# Altium PCB PCB1.PcbDoc
Units mil, origin at the board's own origin, x right, y up, seen from the top; angles counter-clockwise.
Board outline 1865 x 2080 mil, 2 copper layers (Top Layer, Bottom Layer); 15 components, 12 nets, 36 pads, 0 vias.
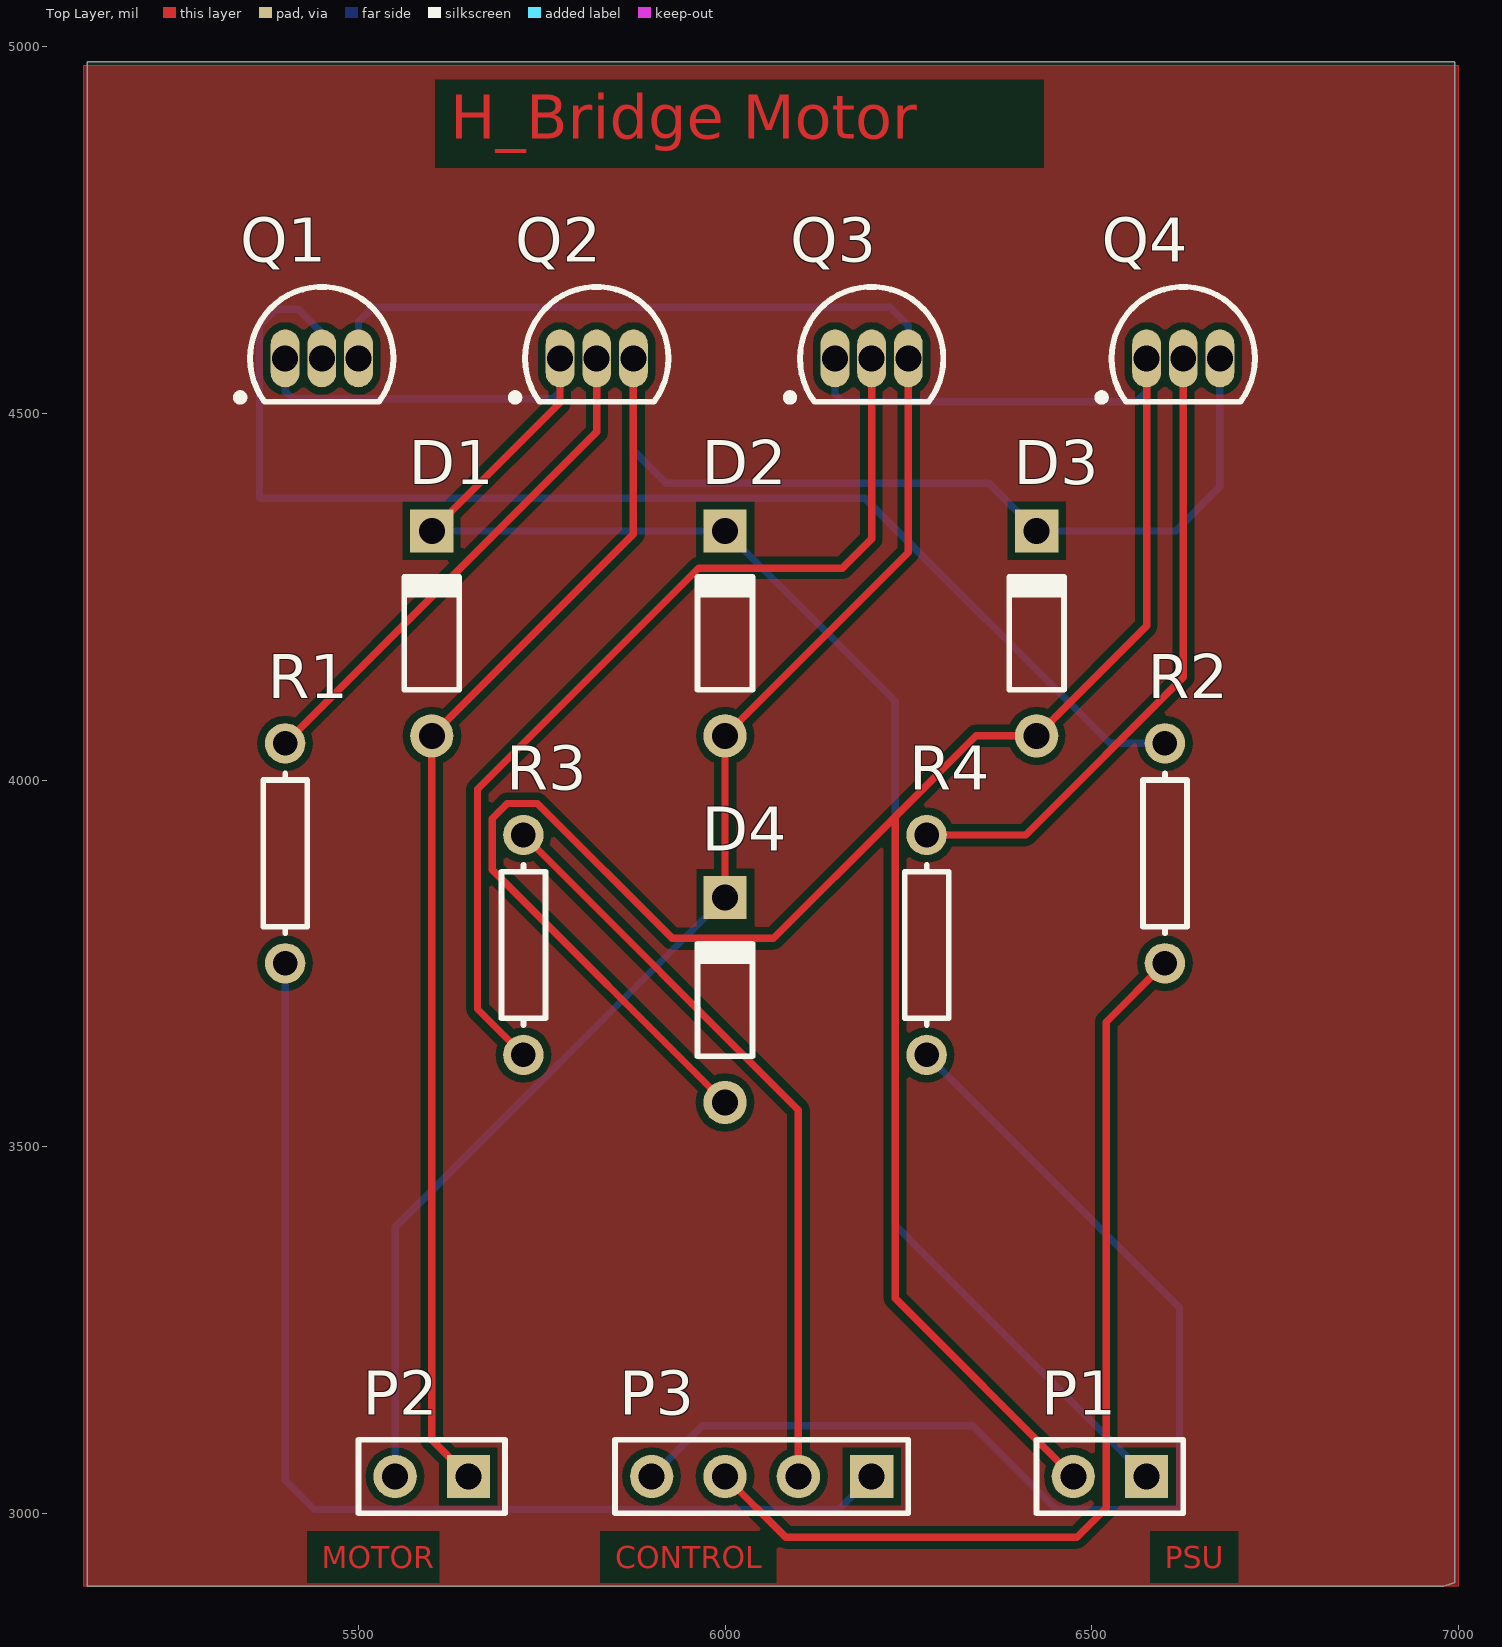
[diagram p0: Top Layer view]
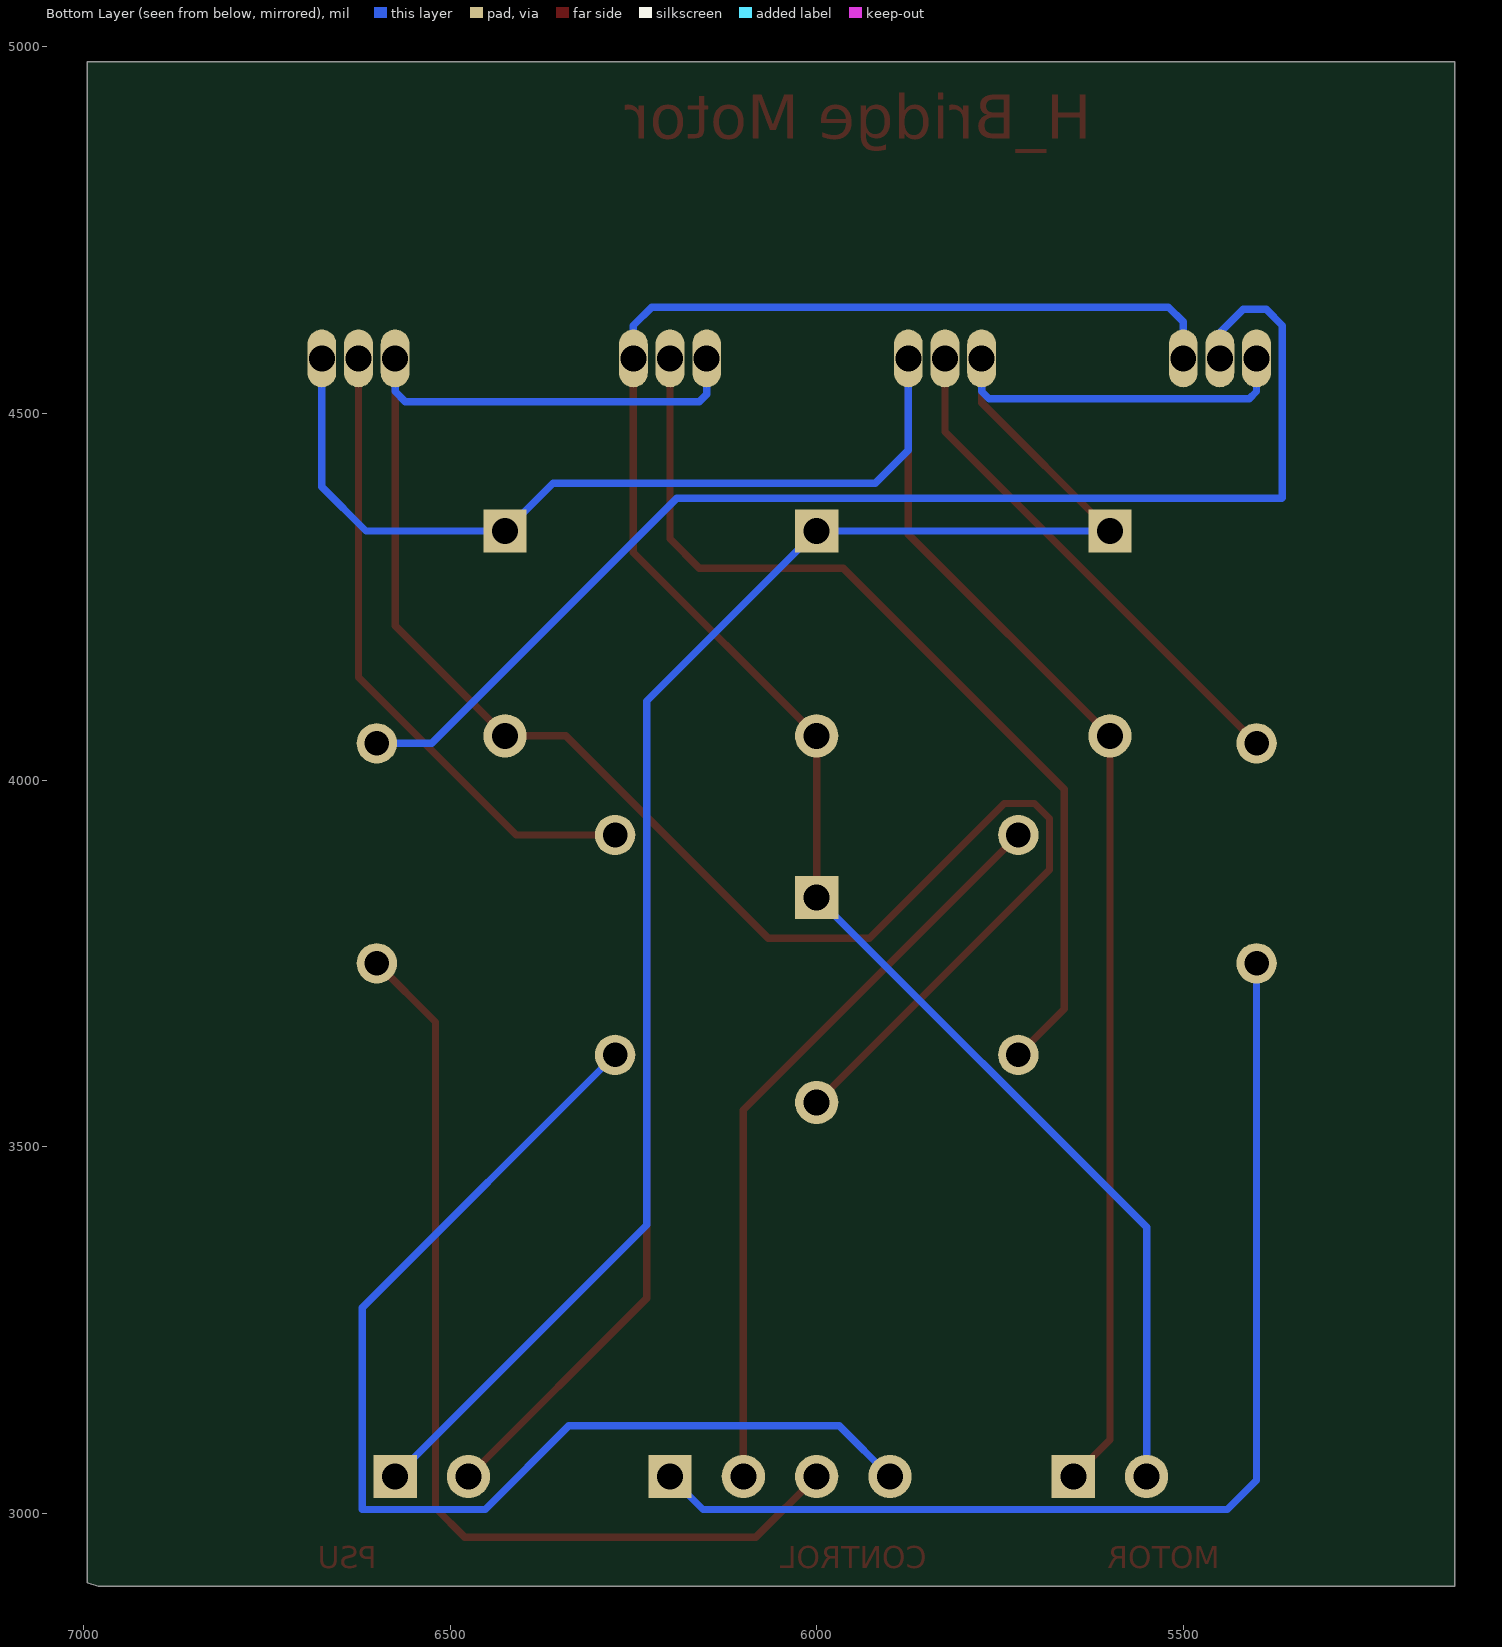
[diagram p1: Bottom Layer view, seen from below]

## Layer stack, top to bottom
Top Solder: solder mask 0.4, Solder Resist, Dk 3.5
Top Layer: signal copper 1.4
Dielectric 1: dielectric 12.6, FR-4, Dk 4.8
Bottom Layer: signal copper 1.4
Bottom Solder: solder mask 0.4, Solder Resist, Dk 3.5

## Board outline
5130,2900 6980,2900 6995,2905 6995,4980 5130,4980

## Design rules (kind name [scope] priority, off if disabled: settings)
Clearance [All] p1: gap=10 ignorepadtopadclearanceinfootprint=FALSE except(0: Arc-Hole Track-Hole SMDPad-Hole THPad-Hole Via-Hole Fill-Hole Poly-Hole Region-Hole Text-Hole)
PolygonConnect [All] p1: connectstyle=Relief reliefconductorwidth=10 reliefentries=4 polygonreliefangle="90 Angle" airgapwidth=10
RoomDefinition H_bridge_sch [InComponentClass('H_bridge_sch')] p1: confinementstyle=ConfineIn formatcopy=TRUE lockcomponents=FALSE outline 7015,3715 7100,3715 7100,4235 7015,4235
RoutingVias [All] p1: holewidth=28 width=50 viastyle="Through Hole" minholewidth=28 minwidth=50 maxholewidth=28 maxwidth=50
SolderMaskExpansion [All] p1: expansion=4
Width [All] p1: maxlimit=10 minlimit=10 preferedwidth=10
30 further rules are at their usual default settings.

## Components (designator, comment, footprint, x,y, rotation, side; value= is the part's Value field where it differs from the comment)
D1 "Diode 1N914" DO-35 5600,4200 r90 top
D2 "Diode 1N914" DO-35 6000,4200 r90 top
D3 "Diode 1N914" DO-35 6425,4200 r90 top
D4 "Diode 1N914" DO-35 6000,3700 r90 top
P1 "PSU" HDR1X2 6575,3050 r180 top
P2 "MOTOR" HDR1X2 5650,3050 r180 top
P3 "CONTROL" HDR1X4 6200,3050 r180 top
Q1 "2N3906" TO-92A 5450,4575 r270 top
Q2 "2N3906" TO-92A 5825,4575 r270 top
Q3 "2N3904" TO-92A 6200,4575 r270 top
Q4 "2N3904" TO-92A 6625,4575 r270 top
R1 "Res1" AXIAL-0.3 5400,3900 r90 top value=1K
R2 "Res1" AXIAL-0.3 6600,3900 r90 top value=1K
R3 "Res1" AXIAL-0.3 5725,3775 r90 top value=1K
R4 "Res1" AXIAL-0.3 6275,3775 r90 top value=1K

## Footprints (in the part's own frame and the unit in brackets; to place one, negate y for a bottom-side part, rotate by r counter-clockwise, add the part's x,y. Pads: shape width x height; smd on the part's side, far side on the other; paste and mask are expansions set on the pad)
AXIAL-0.3 [mm] "Axial Device, Thru-Hole; 2 Leads; 0.3 in Pin Spacing"
  round 1.4 hole 0.85: 1(-3.81,0) 2(3.81,0)
  silkscreen extent -2.77,-0.76 2.77,0.76
DO-35 [mm] "Diode, Axial; Body 3.8 x 1.9 mm (LxDia. max), Lead Dia. 0.53 mm (max)"
  round 1.5 hole 0.9: 1(-3.55,0)
  rect 1.5x1.5 hole 0.9: 2(3.55,0)
  silkscreen extent -1.95,-0.95 2.05,0.95
HDR1X2 [mm] "Connector; Header; 2 Position"
  rect 1.5x1.5 hole 0.9: 1(0,0)
  round 1.5 hole 0.9: 2(2.54,0)
  silkscreen extent -1.27,-1.27 3.81,1.27
HDR1X4 [mm] "Connector; Header; 4 Position"
  rect 1.5x1.5 hole 0.9: 1(0,0)
  round 1.5 hole 0.9: 2(2.54,0) 3(5.08,0) 4(7.62,0)
  silkscreen extent -1.27,-1.27 8.89,1.27
TO-92A [mm] "TO, Flat Index; 3 In-Line, Axial Leads; Body Dia. 4.5mm; Leads 0.51 x 0.48 mm (max)"
  oval 2x1 hole 0.9: 1(0,-1.27) 2(0,0) 3(0,1.27)
  silkscreen extent -2.48,-2.95 1.5,2.48, body extent -2.48,-2.5 1.5,2.5, height 6.86

## Part data
D1 D2 D3 D4: "High Conductance Fast Diode", Code_JEDEC=DO-204-AH, ComponentLink1Description="Manufacturer Link", ComponentLink1URL=http://www.fairchildsemi.com/, ComponentLink2Description=Datasheet, ComponentLink2URL=http://www.fairchildsemi.com/ds/1N%2F1N4448.pdf, DatasheetVersion=1997, LatestRevisionDate=17-Jul-2002, LatestRevisionNote="Re-released for DXP Platform.", PackageDescription="Diode, Axial; Body 3.8 x 1.9 mm (LxDia. max), Lead Dia. 0.53 mm (max)", PackageReference=DO-35, Published=8-Jun-2000, Publisher="Altium Limited"
P1 P2: library part "Header 2", "Header, 2-Pin", LatestRevisionDate=17-Jul-2002, LatestRevisionNote="Re-released for DXP Platform.", Publisher="Altium Limited"
P3: library part "Header 4", "Header, 4-Pin", LatestRevisionDate=17-Jul-2002, LatestRevisionNote="Re-released for DXP Platform.", Publisher="Altium Limited"
Q1 Q2: "PNP General Purpose Amplifier", ComponentLink1Description="Manufacturer Link", ComponentLink1URL=http://www.fairchildsemi.com/, ComponentLink2Description=Datasheet, ComponentLink2URL=http://www.fairchildsemi.com/ds/2N%2F2N3906.pdf, DatasheetVersion=1997, LatestRevisionDate=15-Jan-2003, LatestRevisionNote="PCB Footprint 'BCY-W3/D4.7' replaced", PackageDescription="TO, Flat Index; 3 In-Line, Axial Leads; Body Dia. 4.5mm; Leads 0.51 x 0.48 mm (max)", PackageReference=TO-92A, PackageVersion=Sep-1998, Published=8-Jun-2000, Publisher="Altium Limited"
Q3 Q4: "NPN General Purpose Amplifier", ComponentLink1Description="Manufacturer Link", ComponentLink1URL=http://www.fairchildsemi.com/, ComponentLink2Description=Datasheet, ComponentLink2URL=http://www.fairchildsemi.com/ds/2N%2F2N3904.pdf, DatasheetVersion=1997, LatestRevisionDate=15-Jan-2003, LatestRevisionNote="PCB Footprint 'BCY-W3/D4.7' replaced", PackageDescription="TO, Flat Index; 3 In-Line, Axial Leads; Body Dia. 4.5mm; Leads 0.51 x 0.48 mm (max)", PackageReference=TO-92A, PackageVersion=Sep-1998, Published=8-Jun-2000, Publisher="Altium Limited"
R1 R2 R3 R4: "Resistor", LatestRevisionDate=17-Jul-2002, LatestRevisionNote="Re-released for DXP Platform.", PackageDescription="Axial Device, Thru-Hole; 2 Leads; 0.3 in Pin Spacing", PackageReference=AXIAL-0.3, Published=8-Jun-2000, Publisher="Altium Limited"

## Nets (pads, with @x,y where several pads share a name; then routed paths per layer and width w, separated by ;. In a path a pad name is that pad's centre, name@x,y a point inside that pad or via, vN(x,y) a via of type N, cw(c..) or ccw(c..) an arc to the next point about the centre after c; other vN are vias at no path point)
GND: D3.1 D4.1 P1.2 Q3.1 Q4.1 | length 3566.9
  Top Layer w10: D4.1 5682.44,3877.8 5682.44,3947.44 5703,3968 5744,3968 5928,3784 6066,3784 6232,3950 ; P1.2 6232,3293 6232,3950 ; Q4.1 6575,4210.24 D3.1 6342.24,4060.24 6232,3950
  Bottom Layer w10: Q3.1 6150,4526 6160,4516 6561,4516 6575,4530 Q4.1
NetD1_1: D1.1 D3.2 P2.1 Q2.3 Q4.3 | length 2830.2
  Top Layer w10: P2.1 5600,3100 D1.1 5875,4335.24 Q2.3
  Bottom Layer w10: Q2.3 5875,4450 5920,4405 6359.76,4405 D3.2 6614.76,4339.76 6675,4400 Q4.3
NetD1_2: D1.2 D2.2 P1.1 Q1.1 Q2.1 | length 2708.9
  Top Layer w10: D1.2 5775,4514.76 Q2.1
  Bottom Layer w10: Q1.1 5400,4530 5410,4520 5765,4520 5775,4530 Q2.1 ; D1.2 D2.2 6232,4107.76 6232,3393 P1.1
NetD2_1: D2.1 D4.2 P2.2 Q1.3 Q3.3 | length 2678.6
  Top Layer w10: D4.2 D2.1 6250,4310.24 Q3.3
  Bottom Layer w10: Q1.3 5500,4625 5520,4645 6225,4645 6250,4620 Q3.3 ; P2.2 5550,3389.76 D4.2
NetP3_1: P3.1 R1.1 | length 1540.2
  Bottom Layer w10: R1.1 5400,3045 5440,3005 6155,3005 P3.1
NetP3_2: P3.2 R3.2 | length 1030.3
  Top Layer w10: R3.2 6100,3550 P3.2
NetP3_3: P3.3 R2.1 | length 1347.1
  Top Layer w10: P3.3 6083,2967 6480,2967 6520,3007 6520,3670 R2.1
NetP3_4: P3.4 R4.1 | length 1558.7
  Bottom Layer w10: P3.4 5969,3119 6338,3119 6452,3005 6620,3005 6620,3280 R4.1
NetQ1_2: Q1.2 R2.2 | length 1751.1
  Bottom Layer w10: Q1.2 5450,4610 5418,4642 5387,4642 5365,4620 5365,4385 5365.71,4384.29 6190.71,4384.29 6525,4050 R2.2
NetQ2_2: Q2.2 R1.2 | length 701
  Top Layer w10: R1.2 5825,4475 Q2.2
NetQ3_2: Q3.2 R3.1 | length 1313.5
  Top Layer w10: R3.1 5662.44,3687.56 5662.44,3987.56 5963.88,4289 6160,4289 6200,4329 Q3.2
NetQ4_2: Q4.2 R4.2 | length 874.1
  Top Layer w10: R4.2 6410,3925 6625,4140 Q4.2

## Polygon pours and split planes (outlines as drawn)
no net on Top Layer (solid, pour order 4): 5125,4975 7000,4975 7000,2900 5125,2900
GND on Top Layer "GND_L01_P002" (solid, pour order 2): 5125,4975 7000,4975 7000,2900 5125,2900
GND on Top Layer "GND_L01_P000" (solid, pour order 0): 7000,4975 7000,2900 5125,2900 5125,4975

## Other copper
Top Layer:
  text "H_Bridge Motor" at 5625,4875 h60
  text "MOTOR" at 5450,2925 h30
  text "CONTROL" at 5850,2925 h30
  text "PSU" at 6600,2925 h30
Bottom Layer: